# Altium PCB panel.PcbDoc
Units mm, origin at the board's own origin, x right, y up, seen from the top; angles counter-clockwise.
Board outline 37.34 x 32.64 mm, 2 copper layers (Top Layer, Bottom Layer); 32 components, 18 nets, 70 pads, 16 vias.
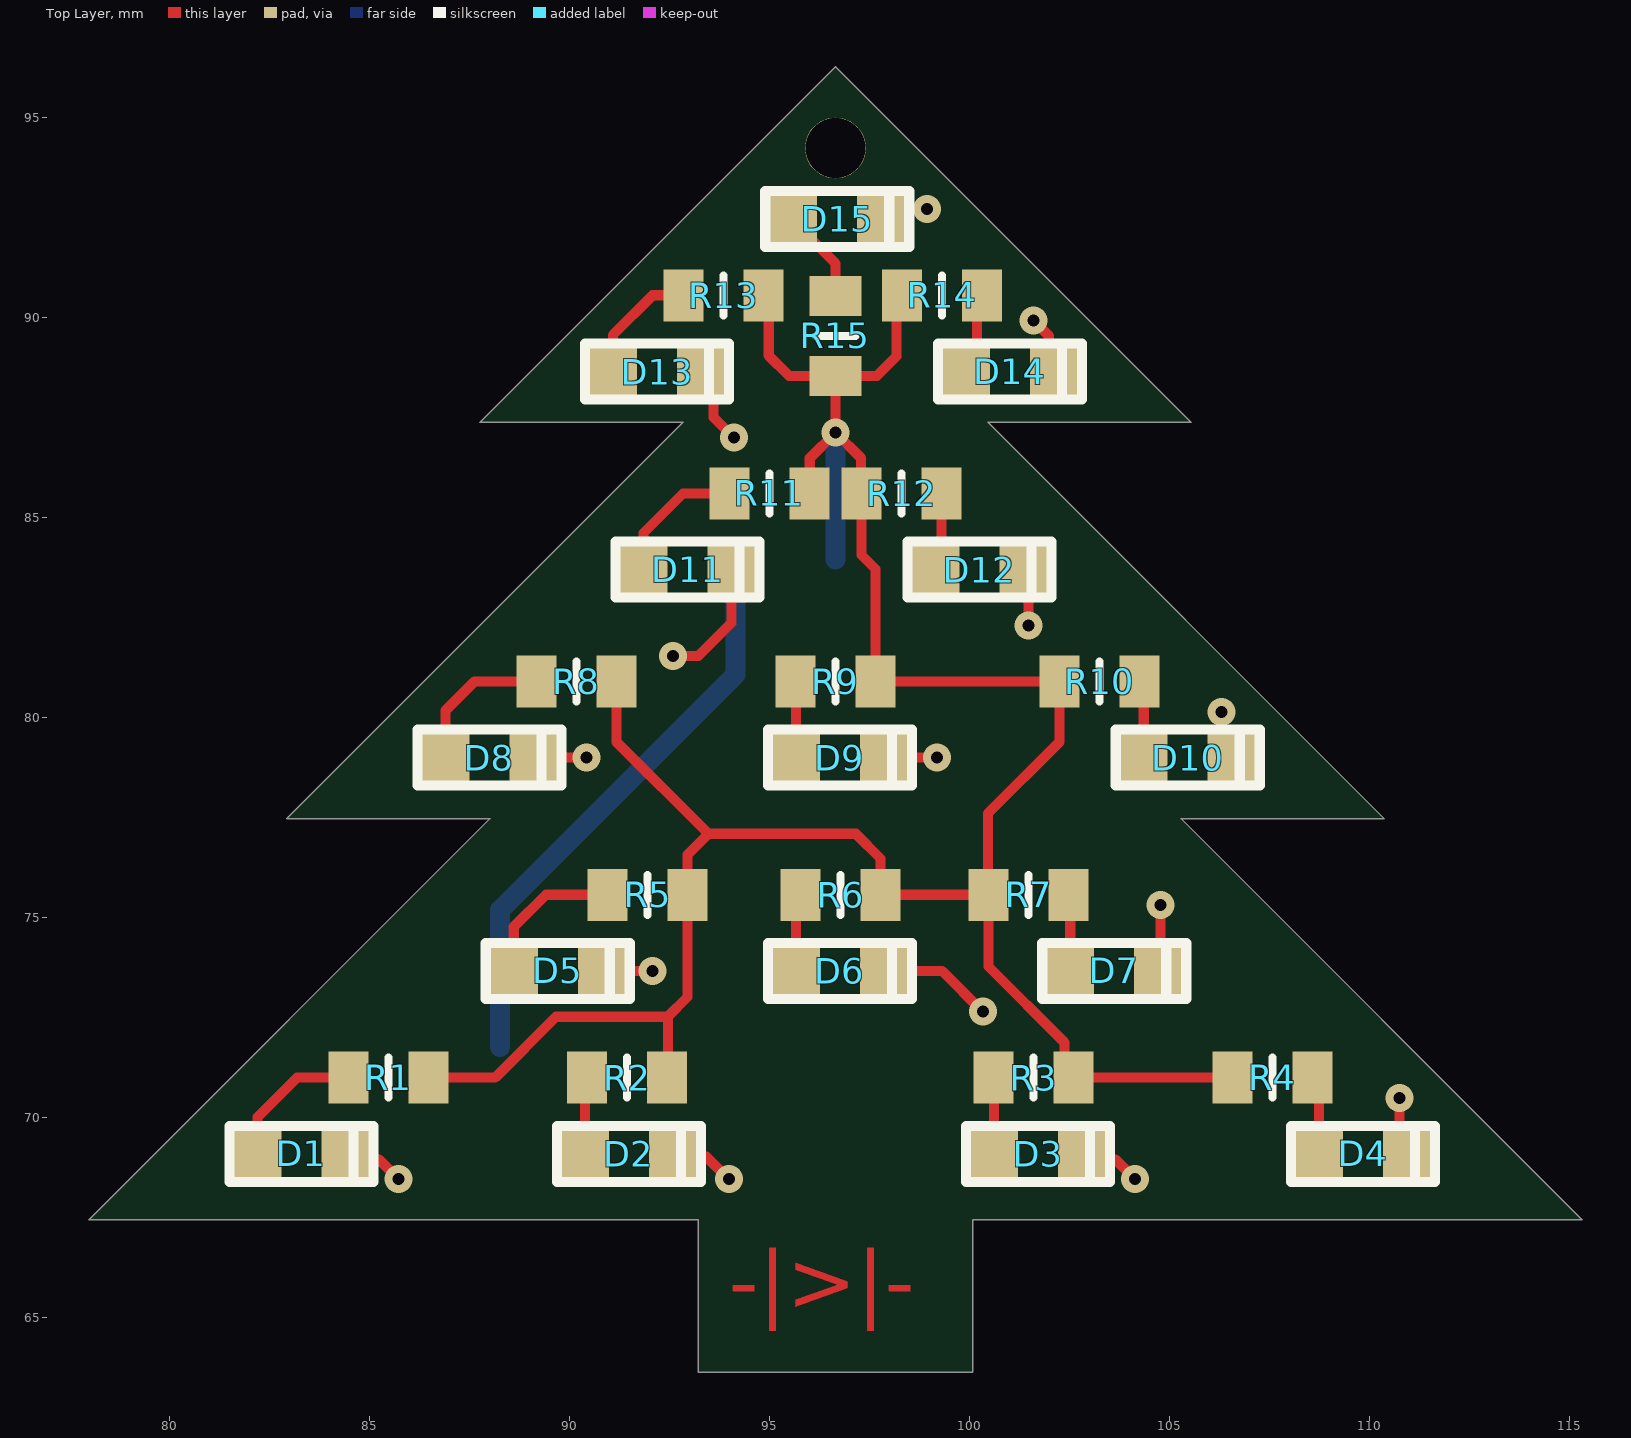
[diagram p0: Top Layer view]
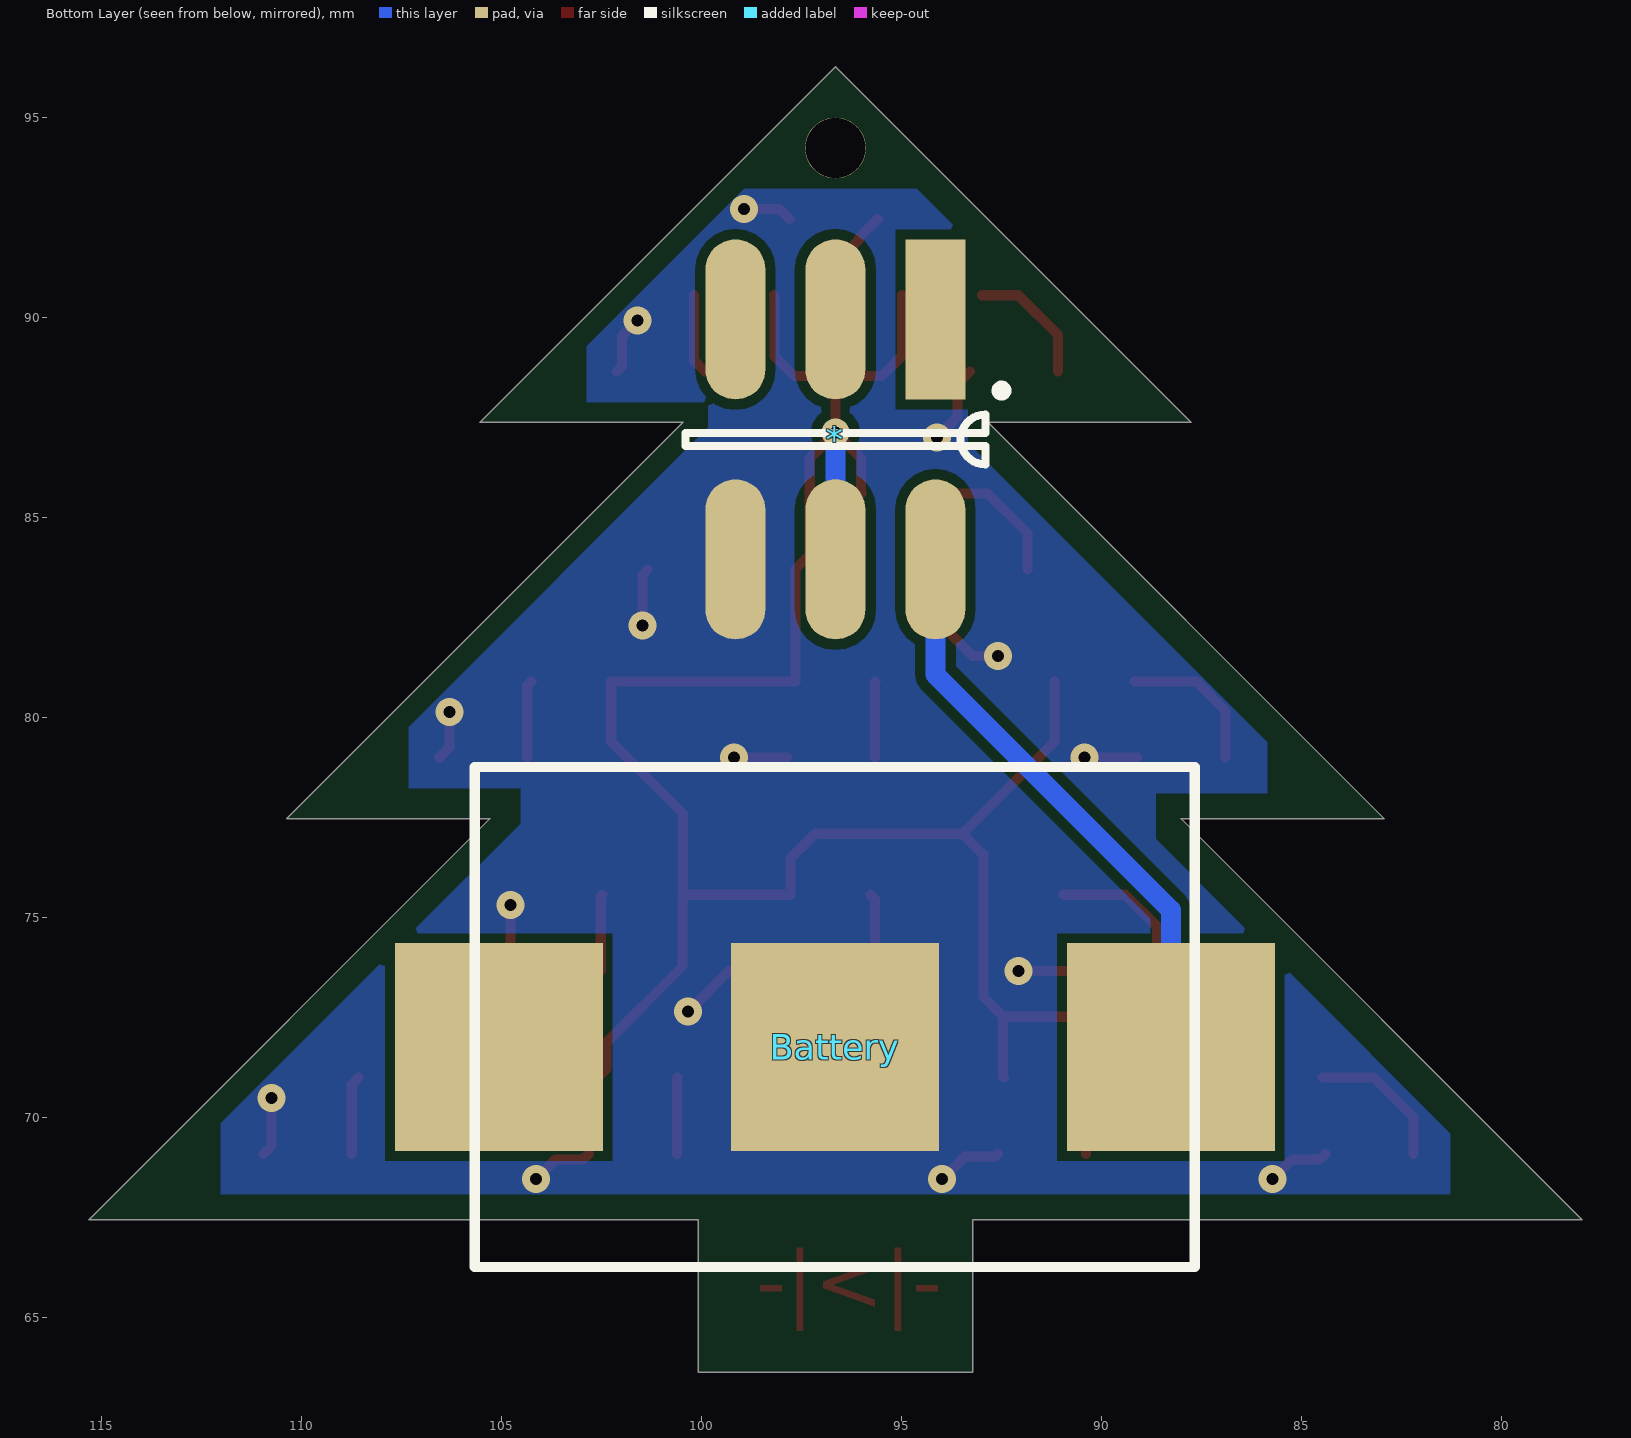
[diagram p1: Bottom Layer view, seen from below]
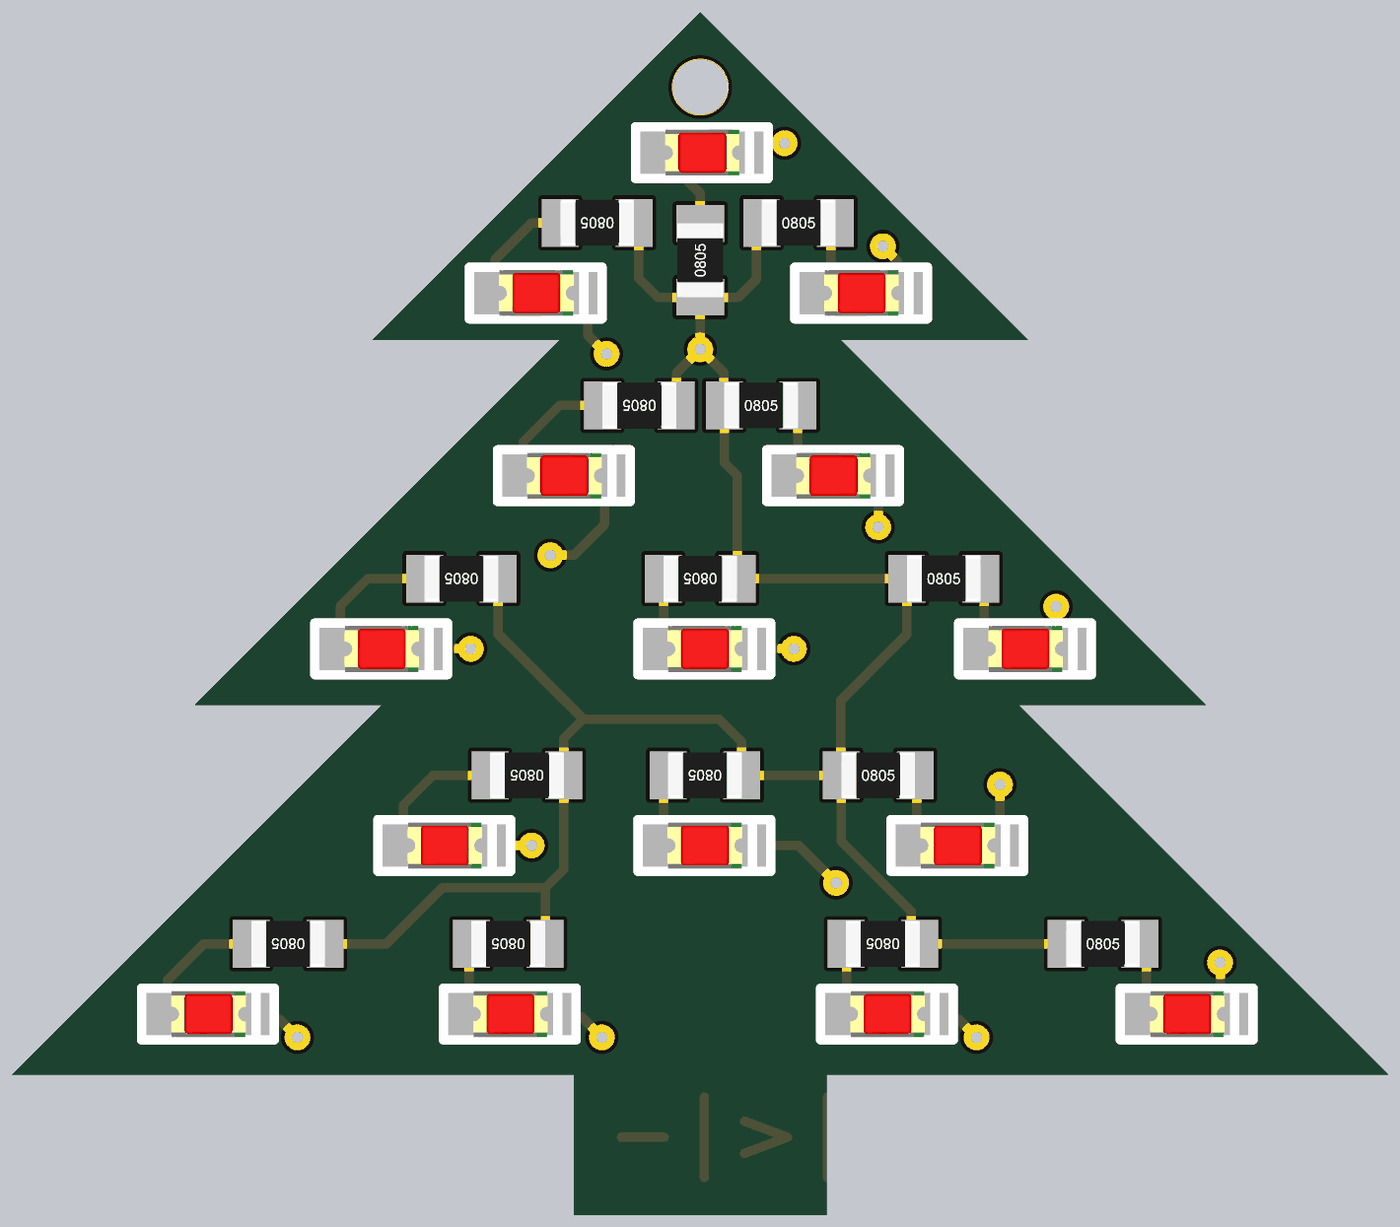
[diagram p2: 3D render of the assembled board from above, using the file's embedded part models]

## Layer stack, top to bottom
Top Solder: solder mask 0.0102, Solder Resist, Dk 3.5
Top Layer: signal copper 0.0356
Dielectric 1: dielectric 0.32, FR-4, Dk 4.8
Bottom Layer: signal copper 0.0356
Bottom Solder: solder mask 0.0102, Solder Resist, Dk 3.5

## Board outline
82.931,77.47 88.011,77.47 77.978,67.437 93.218,67.437 93.218,63.627 100.076,63.627 100.076,67.437 115.316,67.437 105.283,77.47 110.363,77.47 100.457,87.376 105.537,87.376 96.647,96.266 87.757,87.376 92.837,87.376

## Design rules (kind name [scope] priority, off if disabled: settings)
Clearance [All] p1: gap=0.254 ignorepadtopadclearanceinfootprint=FALSE except(0: Arc-Hole Track-Hole SMDPad-Hole THPad-Hole Via-Hole Fill-Hole Poly-Hole Region-Hole Text-Hole)
MinimumSolderMaskSliver [All] p1: minsoldermaskwidth=0
PolygonConnect [All] p1: connectstyle=Direct reliefconductorwidth=0.254 reliefentries=4 polygonreliefangle="90 Angle" airgapwidth=0.254
RoutingVias [All] p1: holewidth=0.711 width=1.27 viastyle="Through Hole" minholewidth=0.2 minwidth=0.2 maxholewidth=0.711 maxwidth=1.27
SilkToSolderMaskClearance [IsPad] p1: minsilkscreentomaskgap=0 clearancetoexposedcopper=TRUE
SolderMaskExpansion [All] p1: expansion=0.102 istentingtop=FALSE
Width [All] p1: maxlimit=1 minlimit=0.254 preferedwidth=0.254
28 further rules are at their usual default settings.

## Components (designator, comment, footprint, x,y, rotation, side; value= is the part's Value field where it differs from the comment)
* "MSS_22D18_switch" MSS_22D18_switch 94.147,89.947 r270 bottom
Battery "LR44_battery_holder" LR44_battery_holder 96.665,71.755 r0 bottom
D1 "LED Red" FP_0805_LED_RED 82.296,69.088 r0 top
D2 "LED Red" FP_0805_LED_RED 90.483,69.088 r0 top
D3 "LED Red" FP_0805_LED_RED 100.711,69.088 r0 top
D4 "LED Red" FP_0805_LED_RED 108.839,69.088 r0 top
D5 "LED Red" FP_0805_LED_RED 88.705,73.66 r0 top
D6 "LED Red" FP_0805_LED_RED 95.758,73.66 r0 top
D7 "LED Red" FP_0805_LED_RED 102.616,73.66 r0 top
D8 "LED Red" FP_0805_LED_RED 86.995,78.994 r0 top
D9 "LED Red" FP_0805_LED_RED 95.758,78.994 r0 top
D10 "LED Red" FP_0805_LED_RED 104.453,78.994 r0 top
D11 "LED Red" FP_0805_LED_RED 91.948,83.693 r0 top
D12 "LED Red" FP_0805_LED_RED 99.246,83.693 r0 top
D13 "LED Red" FP_0805_LED_RED 91.186,88.646 r0 top
D14 "LED Red" FP_0805_LED_RED 100.008,88.646 r0 top
D15 "LED Red" FP_0805_LED_RED 95.69,92.456 r0 top
R1 "220R" FP_0805_RES 85.471,70.993 r180 top
R2 "220R" FP_0805_RES 91.44,70.993 r180 top
R3 "220R" FP_0805_RES 101.6,70.993 r180 top
R4 "220R" FP_0805_RES 107.569,70.993 r0 top
R5 "220R" FP_0805_RES 91.948,75.565 r180 top
R6 "220R" FP_0805_RES 96.774,75.565 r180 top
R7 "220R" FP_0805_RES 101.473,75.565 r0 top
R8 "220R" FP_0805_RES 90.17,80.899 r180 top
R9 "220R" FP_0805_RES 96.647,80.899 r180 top
R10 "220R" FP_0805_RES 103.251,80.899 r0 top
R11 "220R" FP_0805_RES 94.996,85.598 r180 top
R12 "220R" FP_0805_RES 98.298,85.598 r0 top
R13 "220R" FP_0805_RES 93.853,90.551 r180 top
R14 "220R" FP_0805_RES 99.314,90.551 r0 top
R15 "220R" FP_0805_RES 96.647,89.535 r90 top

## Footprints (in the part's own frame and the unit in brackets; to place one, negate y for a bottom-side part, rotate by r counter-clockwise, add the part's x,y. Pads: shape width x height; smd on the part's side, far side on the other; paste and mask are expansions set on the pad)
FP_0805_LED_RED [mm] "0805 méretû piros LED"
  rect 1.2x1.3 smd: A(-0.1,0) K(2.1,0)
  silkscreen extent -0.8,-0.7 2.8,0.7, body extent 0.01,-0.63 2.03,0.62, height 1.1
FP_0805_RES [mm] "0805 ellenállás"
  rect 1x1.3 smd: 1(-1,0) 2(1,0)
  silkscreen extent 0,-0.5 0,0.5, body extent -1,-0.62 1,0.63, height 0.62
LR44_battery_holder [mm]
  rect 5.2x5.2 smd: N(0,0) P1(-8.4,0) P2(8.4,0)
  silkscreen extent -9,-7 9,5.5
MSS_22D18_switch [mm]
  rect 4x1.5 smd: 1(0,0)
  oval 4x1.5 smd: 2(0,-2.5) 3(0,-5) 4(6,0) 5(6,-2.5) 6(6,-5)
  silkscreen extent 1.65,-6.25 3.62,1.78

## Part data
D1 D2 D3 D4 D5 D6 D7 D8 D9 D10 D11 D12 D13 D14 D15: "Red LED", I_max=20mA, Name="MULTICOMP  MCL-S270SRC  LED, Red, SMD, 1.25mm x 1.4mm, 20 mA, 1.85 V, 643 nm", Reference=1581239, Supplier=Farnell, U_fw=1.85V, Wavelength=643nm
R1 R2 R3 R4 R5 R6 R7 R8 R9 R10 R11 R12 R13 R14 R15: library part "RES 220R", "Resistor", Power=125mW, Tolerance=5%, Name="YAGEO (PHYCOMP)  RC0805JR-07220RL  SMD Chip Resistor, Thick Film, 220 ohm", Reference=9233920, Supplier=Farnell

## Free pads (board coordinates)
  round 1.524 hole 1.5: 3(96.647,94.234)

## Via types
v1: diameter 0.7, hole 0.3, Top Layer to Bottom Layer, 16 vias

## Nets (pads, with @x,y where several pads share a name; then routed paths per layer and width w, separated by ;. In a path a pad name is that pad's centre, name@x,y a point inside that pad or via, vN(x,y) a via of type N, cw(c..) or ccw(c..) an arc to the next point about the centre after c; other vN are vias at no path point)
1V5: *.5 R1.1 R2.1 R3.1 R4.1 R5.1 R6.1 R7.1 R8.1 R9.1 R10.1 R11.1 R12.1 R13.1 R14.1 R15.1 | length 65.8
  Top Layer w0.254: R1.1 88.138,70.993 89.662,72.517 92.456,72.517 ; R8.1 91.17,79.391 93.472,77.089 ; R2.1 92.456,71.009 92.456,72.517 ; R13.1@94.98,90.551 94.98,89.043 95.488,88.535 R15.1 ; R11.1 96.005,85.607 96.005,86.48 v1(96.647,87.122) ; R14.1@98.187,90.551 98.171,90.535 98.171,89.027 97.679,88.535 R15.1 ; R4.1 R3.1 102.369,71.224 102.369,71.875 100.473,73.771 R7.1 ; 92.456,72.517 92.948,73.009 R5.1 92.948,76.565 93.472,77.089 ; 93.472,77.089 97.155,77.089 97.774,76.47 R6.1 R7.1 ; v1(96.647,87.122) 97.289,86.48 97.289,85.607 R12.1 97.298,84.058 97.647,83.709 R9.1 R10.1 102.251,79.391 100.457,77.597 100.457,75.581 R7.1 ; v1(96.647,87.122) R15.1
  Bottom Layer w0.5: *.5 v1(96.647,87.122)
GND: *.6 Battery.N D1.K D2.K D3.K D4.K D5.K D6.K D7.K D8.K D9.K D10.K D11.K D12.K D13.K D14.K D15.K | length 25.4
  Top Layer w0.254: D1.K 84.534,68.95 85.228,68.95 v1(85.725,68.453) ; D8.K v1(90.424,78.994) ; D5.K v1(92.075,73.66) ; D2.K 92.653,69.018 93.415,69.018 v1(93.98,68.453) ; v1(92.583,81.534) 93.218,81.534 94.048,82.364 D11.K ; D13.K 93.599,88.333 93.599,87.503 v1(94.107,86.995) ; D15.K 98.044,92.71 v1(98.933,92.71) ; D6.K 99.314,73.66 v1(100.33,72.644) ; D9.K v1(99.187,78.994) ; D12.K 101.473,83.566 v1(101.473,82.296) ; v1(101.6,89.916) 101.988,89.528 101.988,88.766 D14.K ; D3.K 102.949,68.95 103.643,68.95 v1(104.14,68.453) ; D7.K 104.775,73.719 v1(104.775,75.311) ; v1(106.299,80.137) 106.299,79.248 D10.K ; v1(110.744,70.485) 110.744,69.283 D4.K
Net*_4: *.4 Battery.P1 | length 14.6
  Bottom Layer w0.5: Battery.P1 88.265,75.184 94.147,81.066 *.4
NetD1_1: D1.A R1.2 | length 3.6
  Top Layer w0.254: D1.A 82.196,70.004 83.185,70.993 R1.2
NetD2_1: D2.A R2.2 | length 1.9
  Top Layer w0.254: D2.A 90.383,70.936 R2.2
NetD3_1: D3.A R3.2 | length 1.9
  Top Layer w0.254: R3.2 100.611,70.982 D3.A
NetD4_1: D4.A R4.2 | length 2
  Top Layer w0.254: R4.2 108.739,70.823 D4.A
NetD5_1: D5.A R5.2 | length 3.8
  Top Layer w0.254: D5.A 88.605,74.762 89.408,75.565 R5.2
NetD6_1: D6.A R6.2 | length 2
  Top Layer w0.254: D6.A 95.658,75.449 R6.2
NetD7_1: D7.A R7.2 | length 1.9
  Top Layer w0.254: R7.2 102.516,75.522 D7.A
NetD8_1: D8.A R8.2 | length 3.7
  Top Layer w0.254: D8.A 86.895,80.164 87.63,80.899 R8.2
NetD9_1: D9.A R9.2 | length 1.9
  Top Layer w0.254: R9.2 95.658,80.888 D9.A
NetD10_1: D10.A R10.2 | length 1.9
  Top Layer w0.254: R10.2 104.353,80.797 D10.A
NetD11_1: D11.A R11.2 | length 3.5
  Top Layer w0.254: D11.A 91.848,84.609 92.837,85.598 R11.2
NetD12_1: D12.A R12.2 | length 2
  Top Layer w0.254: D12.A@99.146,84.201 99.298,84.353 ; D12.A@99.298,83.845 R12.2
NetD13_1: D13.A R13.2 | length 3.2
  Top Layer w0.254: D13.A 91.086,89.562 92.075,90.551 R13.2@92.98,90.551
NetD14_1: D14.A R14.2 | length 2
  Top Layer w0.254: D14.A 100.187,88.925 R14.2@100.187,90.551
NetD15_1: D15.A R15.2 | length 2.4
  Top Layer w0.254: D15.A 96.063,91.983 96.063,91.933 96.647,91.349 R15.2
pads on no net: *.1 *.2 *.3 Battery.P2

## Polygon pours and split planes (outlines as drawn)
GND on Bottom Layer "GND_L02_P000" (solid, remove dead copper, pour order 0): 81.28,68.072 112.014,68.072 112.014,69.85 104.521,77.343 104.521,78.232 107.315,78.232 107.315,79.756 99.822,87.249 99.822,87.884 102.87,87.884 102.87,89.281 98.933,93.218 94.615,93.218 90.17,88.773 90.17,88.011 93.345,88.011 93.345,86.868 85.852,79.375 85.852,78.105 88.646,78.105 88.646,76.962 81.28,69.596
no net on Bottom Layer "NONET_L02_P001" (solid, pour order 1): 81.407,74.93

## Other copper
Top Layer:
  text "-|>|-" at 93.98,65.151 h1.52

## Silkscreen, mask and mechanical layers (free items; w line width, h text height)
Mechanical 1:
  lines w0.5: 88.011,77.47 77.978,67.437 93.218,67.437 93.218,63.627 96.647,63.627 100.076,63.627 100.076,67.437 115.316,67.437 105.283,77.47 ; 88.02,77.47 82.931,77.47 92.837,87.376 87.757,87.376 96.647,96.266 105.537,87.376 100.457,87.376 110.363,77.47 105.274,77.47